# EAGLE board arduino-configuration-shield (EAGLE 6.5.0)
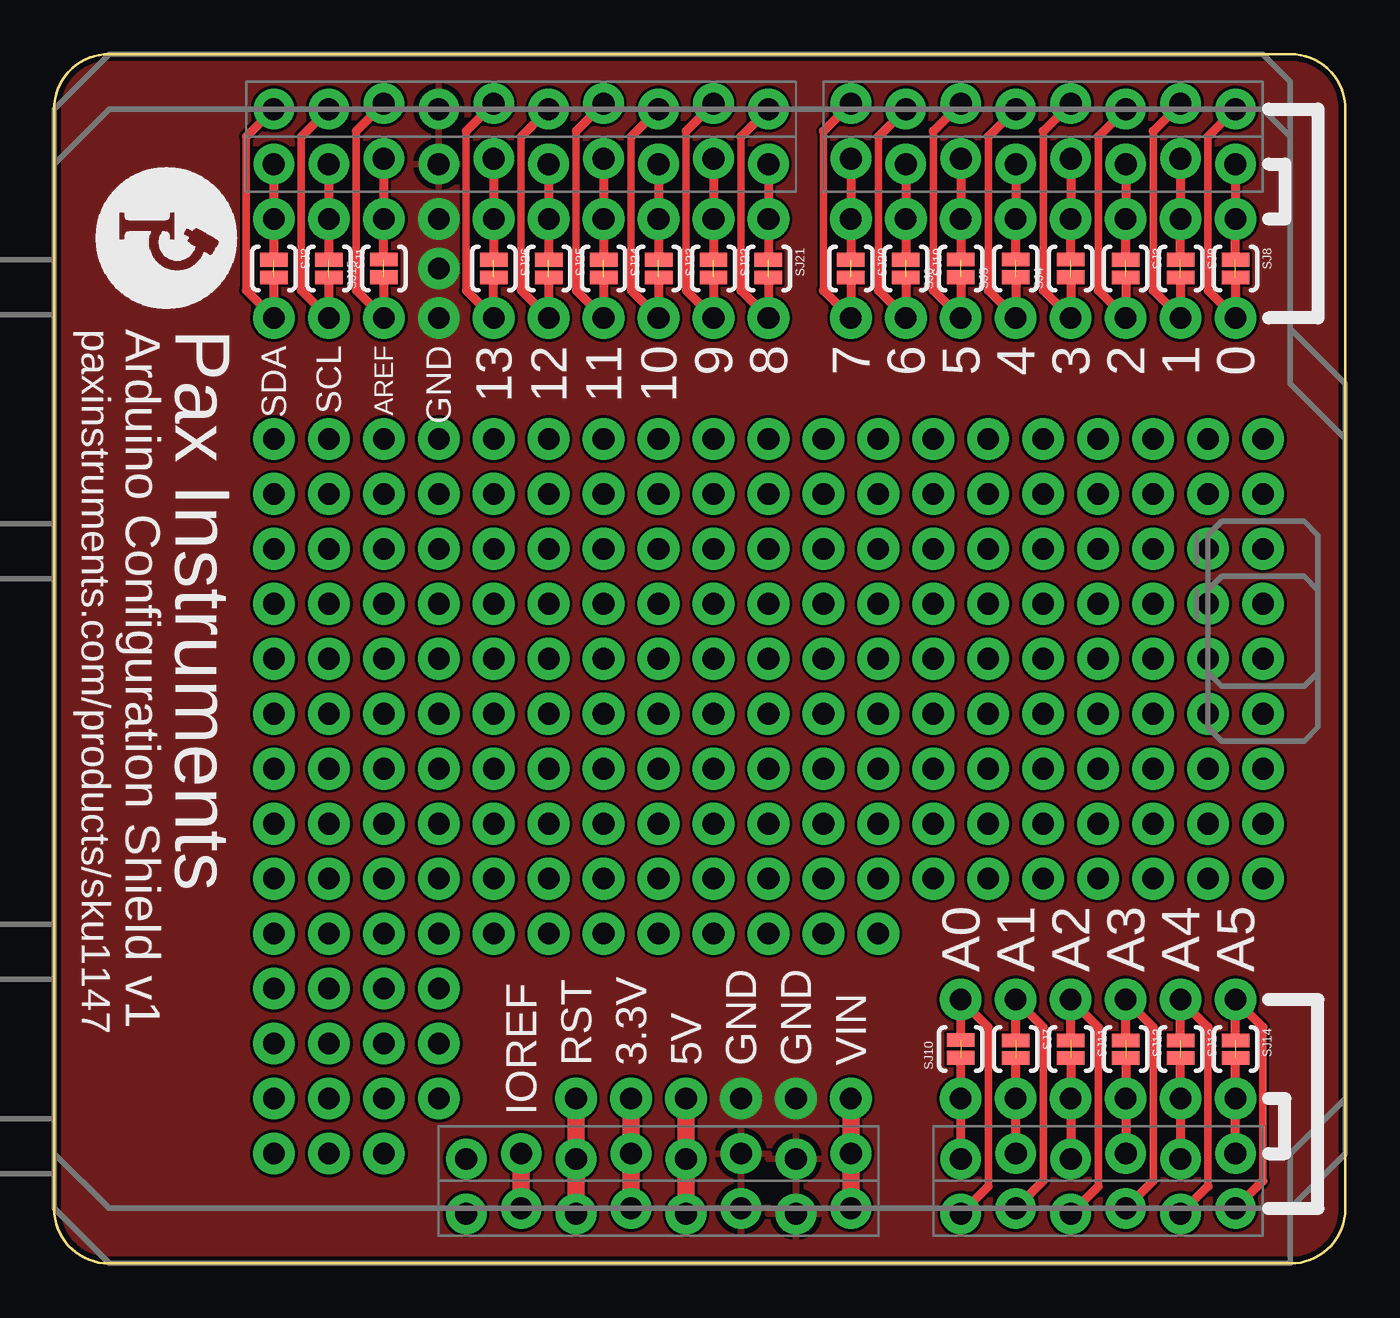
[diagram p0: board, top side]
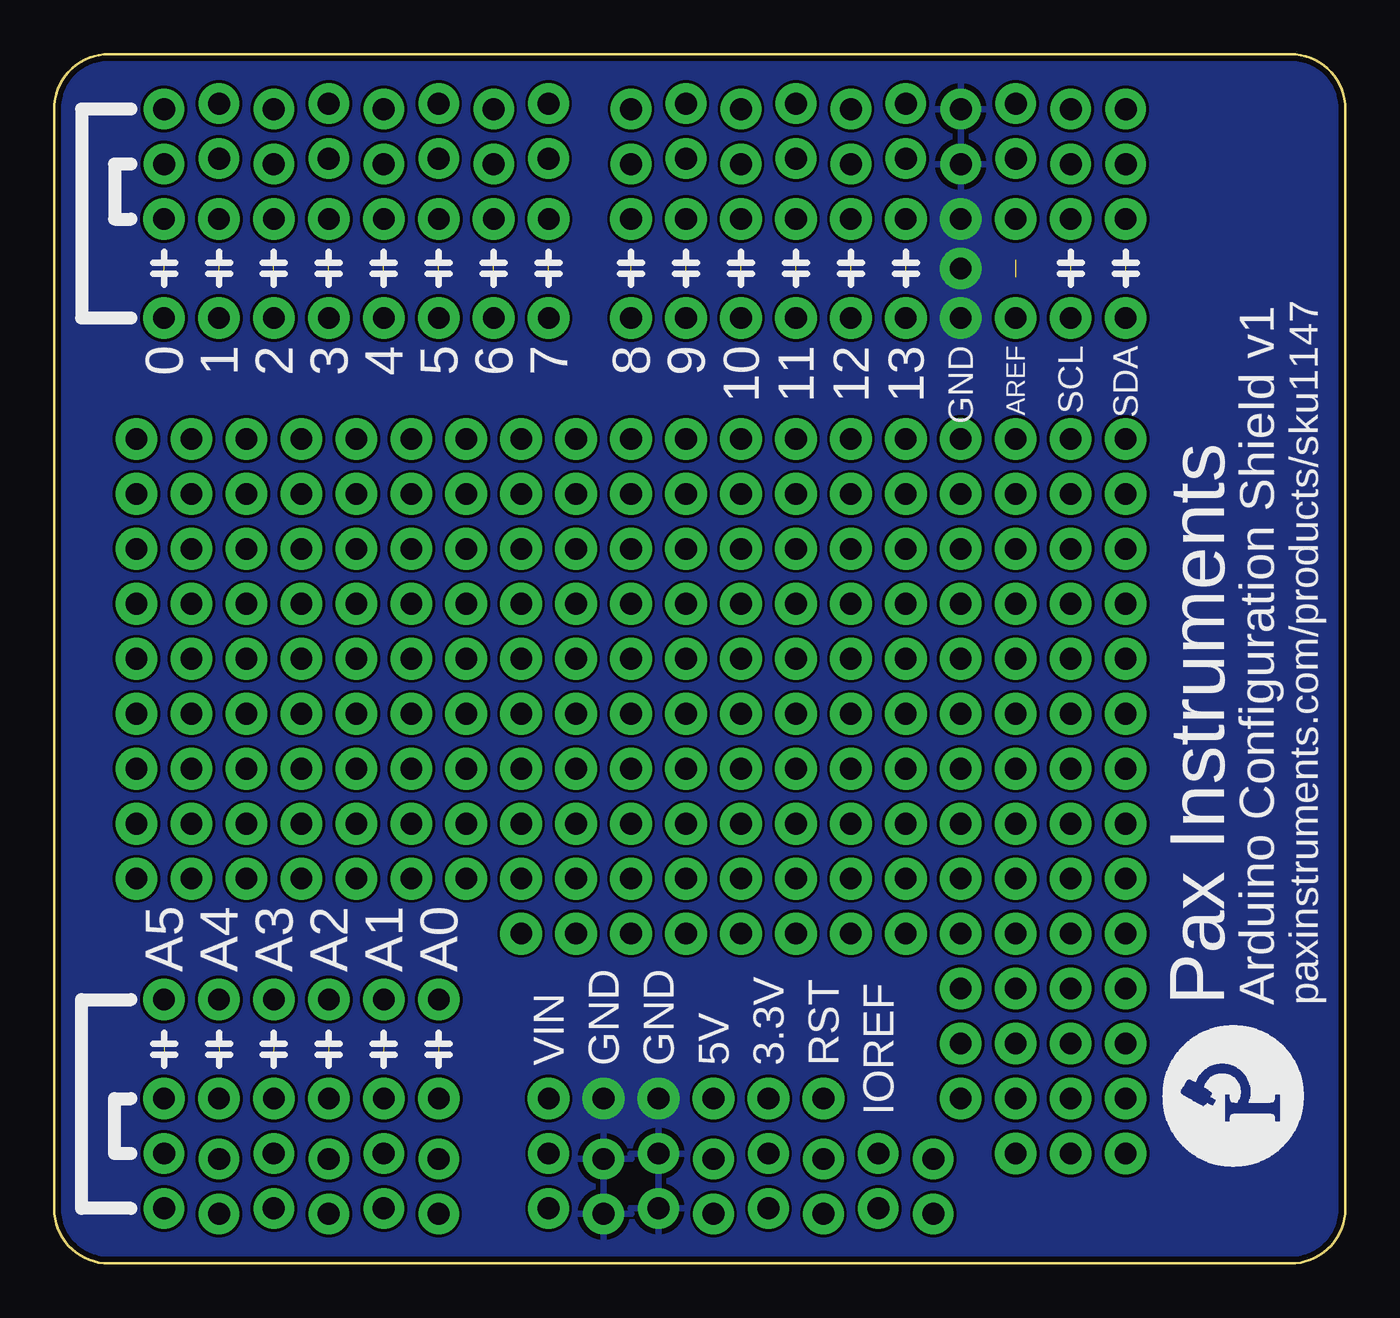
[diagram p1: board, bottom side, seen from below]

Size 59.69 x 55.88 mm. Coordinates in mm from the lower left corner, seen from the top.
Outline: 57.15,0 2.54,0 arc-90 0,2.54 0,53.34 arc-90 2.54,55.88 57.15,55.88 arc-90 59.69,53.34 59.69,2.54 arc-90 57.15,0
Copper layers (1*16): Top 0.035mm / dielectric 1.5mm / Bottom 0.035mm
Design rules "PaxInstrument-T400 *": minimum track width 6mil, minimum drill 13mil, track to track 5mil, track to pad 5mil, pad to pad 5mil, via to via 5mil, smd to smd 5mil, copper to edge 10mil, drill to drill 8mil, minimum pad ring 12mil, minimum via ring 10mil, stop-mask expansion 4mil, vias tented up to drill 25mil, thermal gap 10mil
Net classes: 0 default: width 0.203 mm, drill 0.33 mm; 1 power: width 0.305 mm

## Footprints (pad centres in the part's own frame; a part is rotated, then mirrored left to right if it is on the bottom)
UNO_R3_SHIELD_NOLABELS_LOCK = drill 1.016 pad 1.88: 3.3V 50.8,26.67; 5V 51.054,29.21; A0 51.054,41.91; A1 50.8,44.45; A2 51.054,46.99; A3 50.8,49.53; A4 51.054,52.07; A5 50.8,54.61; AREF 2.286,15.24; D2 2.54,49.53; D3 2.286,46.99; D4 2.54,44.45; D5 2.286,41.91; D6 2.54,39.37; D7 2.286,36.83; D8 2.54,33.02; D9 2.286,30.48; D10 2.54,27.94; D11 2.286,25.4; D12 2.54,22.86; D13 2.286,20.32; GND@0 50.8,31.75; GND@1 51.054,34.29; GND@2 2.54,17.78; IOREF 50.8,21.59; NC 51.054,19.05; RES 51.054,24.13; RX 2.54,54.61; SCL 2.54,10.16; SDA 2.54,12.7; TX 2.286,52.07; VIN 50.8,36.83
PAD-JUMPER-2-NC_BY_PASTE_YES_SILK = smd 0.635 x 1.27: 1 -0.401,0; 2 0.413,0

## Placement (x,y rotation side)
J1  ARDUINO_R3_SHIELDUNO_R3_SHIELD_NOLABELS_LOCK  [UNO_R3_SHIELD_NOLABELS_LOCK]  0,55.88 270 top
J3  ARDUINO_R3_SHIELDUNO_R3_SHIELD_NOLABELS_LOCK  [UNO_R3_SHIELD_NOLABELS_LOCK]  0,53.34 270 top
SJ1  JUMPER-PAD-2-NC_BY_PASTE  [PAD-JUMPER-2-NC_BY_PASTE_YES_SILK]  12.7,45.97 270 top
SJ2  JUMPER-PAD-2-NC_BY_PASTE  [PAD-JUMPER-2-NC_BY_PASTE_YES_SILK]  10.16,45.97 270 top
SJ3  JUMPER-PAD-2-NC_BY_PASTE  [PAD-JUMPER-2-NC_BY_PASTE_YES_SILK]  49.53,45.97 270 top
SJ4  JUMPER-PAD-2-NC_BY_PASTE  [PAD-JUMPER-2-NC_BY_PASTE_YES_SILK]  46.99,45.97 90 top
SJ5  JUMPER-PAD-2-NC_BY_PASTE  [PAD-JUMPER-2-NC_BY_PASTE_YES_SILK]  44.45,45.97 90 top
SJ6  JUMPER-PAD-2-NC_BY_PASTE  [PAD-JUMPER-2-NC_BY_PASTE_YES_SILK]  41.91,45.97 90 top
SJ7  JUMPER-PAD-2-NC_BY_PASTE  [PAD-JUMPER-2-NC_BY_PASTE_YES_SILK]  44.45,9.91 270 top
SJ8  JUMPER-PAD-2-NC_BY_PASTE  [PAD-JUMPER-2-NC_BY_PASTE_YES_SILK]  54.61,45.97 270 top
SJ9  JUMPER-PAD-2-NC_BY_PASTE  [PAD-JUMPER-2-NC_BY_PASTE_YES_SILK]  52.07,45.97 270 top
SJ10  JUMPER-PAD-2-NC_BY_PASTE  [PAD-JUMPER-2-NC_BY_PASTE_YES_SILK]  41.91,9.91 90 top
SJ11  JUMPER-PAD-2-NC_BY_PASTE  [PAD-JUMPER-2-NC_BY_PASTE_YES_SILK]  46.99,9.91 270 top
SJ12  JUMPER-PAD-2-NC_BY_PASTE  [PAD-JUMPER-2-NC_BY_PASTE_YES_SILK]  49.53,9.91 270 top
SJ13  JUMPER-PAD-2-NC_BY_PASTE  [PAD-JUMPER-2-NC_BY_PASTE_YES_SILK]  52.07,9.91 270 top
SJ14  JUMPER-PAD-2-NC_BY_PASTE  [PAD-JUMPER-2-NC_BY_PASTE_YES_SILK]  54.61,9.91 270 top
SJ15  JUMPER-PAD-2-NC_BY_PASTE  [PAD-JUMPER-2-NC_BY_PASTE_YES_SILK]  15.24,45.97 90 top
SJ19  JUMPER-PAD-2-NC_BY_PASTE  [PAD-JUMPER-2-NC_BY_PASTE_YES_SILK]  39.37,45.97 270 top
SJ20  JUMPER-PAD-2-NC_BY_PASTE  [PAD-JUMPER-2-NC_BY_PASTE_YES_SILK]  36.83,45.97 270 top
SJ21  JUMPER-PAD-2-NC_BY_PASTE  [PAD-JUMPER-2-NC_BY_PASTE_YES_SILK]  33.02,45.97 270 top
SJ22  JUMPER-PAD-2-NC_BY_PASTE  [PAD-JUMPER-2-NC_BY_PASTE_YES_SILK]  30.48,45.97 270 top
SJ23  JUMPER-PAD-2-NC_BY_PASTE  [PAD-JUMPER-2-NC_BY_PASTE_YES_SILK]  27.94,45.97 270 top
SJ24  JUMPER-PAD-2-NC_BY_PASTE  [PAD-JUMPER-2-NC_BY_PASTE_YES_SILK]  25.4,45.97 270 top
SJ25  JUMPER-PAD-2-NC_BY_PASTE  [PAD-JUMPER-2-NC_BY_PASTE_YES_SILK]  22.86,45.97 270 top
SJ26  JUMPER-PAD-2-NC_BY_PASTE  [PAD-JUMPER-2-NC_BY_PASTE_YES_SILK]  20.32,45.97 270 top
U$1  [PAXINSTRUMENT_LOGO]  1.78,4.32 90 bottom
U$6  [PAXINSTRUMENT_LOGO]  1.78,50.8 270 top

## Library data of the parts
J1 J3 = SparkFun-Boards
SJ1-SJ15 SJ19-SJ26 = SparkFun-Passives
U$1 U$6 = PaxInstrument-T400

## Nets
3.3V: J1.3.3V J3.3.3V
5V: J1.5V J3.5V
A0: J1.A0 J3.A0 SJ10.1 SJ10.2
A1: J1.A1 J3.A1 SJ7.1 SJ7.2
A2: J1.A2 J3.A2 SJ11.1 SJ11.2
A3: J1.A3 J3.A3 SJ12.1 SJ12.2
A4: J1.A4 J3.A4 SJ13.1 SJ13.2
A5: J1.A5 J3.A5 SJ14.1 SJ14.2
AREF: J1.AREF J3.AREF SJ15.1 SJ15.2
D0: J1.RX J3.RX SJ8.1 SJ8.2
D1: J1.TX J3.TX SJ9.1 SJ9.2
D2: J1.D2 J3.D2 SJ3.1 SJ3.2
D3: J1.D3 J3.D3 SJ4.1 SJ4.2
D4: J1.D4 J3.D4 SJ5.1 SJ5.2
D5: J1.D5 J3.D5 SJ6.1 SJ6.2
D6: J1.D6 J3.D6 SJ19.1 SJ19.2
D7: J1.D7 J3.D7 SJ20.1 SJ20.2
D8: J1.D8 J3.D8 SJ21.1 SJ21.2
D9: J1.D9 J3.D9 SJ22.1 SJ22.2
D10: J1.D10 J3.D10 SJ23.1 SJ23.2
D11(MOSI): J1.D11 J3.D11 SJ24.1 SJ24.2
D12(MISO): J1.D12 J3.D12 SJ25.1 SJ25.2
D13(SCK): J1.D13 J3.D13 SJ26.1 SJ26.2
GND: J1.GND@0 J1.GND@1 J1.GND@2 J3.GND@0 J3.GND@1 J3.GND@2
IOREF: J1.IOREF J3.IOREF
RESET: J1.RES J3.RES
SCL: J1.SCL J3.SCL SJ2.1 SJ2.2
SDA: J1.SDA J3.SDA SJ1.1 SJ1.2
VIN: J1.VIN J3.VIN

## Tracks (layer width: path | path; a pad name or v marks a point on that pad's centre or on a via)
3.3V  (via drill 1 pad 1.93)
  Top 0.813: J3.3.3V J1.3.3V v26.67,7.62
5V  (via drill 1 pad 1.93)
  Top 0.813: J3.5V J1.5V v29.21,7.62
A0  (via drill 1 pad 1.93)  (1 unrouted)
  Top 0.356: 43.18,3.56 43.18,10.92
  Top 0.406: J3.A0 43.18,3.56 | 43.18,10.92 v41.91,12.19 SJ10.2 | SJ10.1 v41.91,7.62 J1.A0
A1  (via drill 1 pad 1.93)  (1 unrouted)
  Top 0.356: 45.72,3.81 45.72,10.92
  Top 0.406: J3.A1 45.72,3.81 | 45.72,10.92 v44.45,12.19 SJ7.1 | SJ7.2 v44.45,7.62 J1.A1
A2  (via drill 1 pad 1.93)  (1 unrouted)
  Top 0.356: 48.26,3.56 48.26,10.92
  Top 0.406: J3.A2 48.26,3.56 | 48.26,10.92 v46.99,12.19 SJ11.1 | v46.99,7.62 SJ11.2 J1.A2
A3  (via drill 1 pad 1.93)  (1 unrouted)
  Top 0.356: 50.8,3.81 50.8,10.92
  Top 0.406: J3.A3 50.8,3.81 | 50.8,10.92 v49.53,12.19 SJ12.1 | v49.53,7.62 SJ12.2 J1.A3
A4  (via drill 1 pad 1.93)  (1 unrouted)
  Top 0.356: 53.34,3.56 53.34,10.92
  Top 0.406: SJ13.2 v52.07,7.62 J1.A4 | SJ13.1 v52.07,12.19 53.34,10.92 | J3.A4 53.34,3.56
A5  (via drill 1 pad 1.93)  (1 unrouted)
  Top 0.356: 55.88,3.81 55.88,10.92
  Top 0.406: J1.A5 v54.61,7.62 SJ14.2 | SJ14.1 v54.61,12.19 55.88,10.92 | J3.A5 55.88,3.81
AREF  (via drill 1 pad 1.93)  (1 unrouted)
  Top 0.356: 13.97,52.32 13.97,44.96
  Top 0.406: J3.AREF v15.24,48.26 SJ15.2 | J1.AREF 13.97,52.32 | 13.97,44.96 v15.24,43.69 SJ15.1
D0  (via drill 1 pad 1.93)  (1 unrouted)
  Top 0.356: 53.34,52.07 53.34,44.96
  Top 0.406: J1.RX 53.34,52.07 | 53.34,44.96 v54.61,43.69 SJ8.2 | J3.RX v54.61,48.26 SJ8.1
D1  (via drill 1 pad 1.93)  (1 unrouted)
  Top 0.356: 50.8,52.32 50.8,44.96
  Top 0.406: J1.TX 50.8,52.32 | 50.8,44.96 v52.07,43.69 SJ9.2 | J3.TX v52.07,48.26 SJ9.1
D2  (via drill 1 pad 1.93)  (1 unrouted)
  Top 0.356: 48.26,52.07 48.26,44.96
  Top 0.406: J1.D2 48.26,52.07 | 48.26,44.96 v49.53,43.69 SJ3.2 | J3.D2 v49.53,48.26 SJ3.1
D3  (via drill 1 pad 1.93)  (1 unrouted)
  Top 0.356: 45.72,52.32 45.72,44.96
  Top 0.406: J1.D3 45.72,52.32 | 45.72,44.96 v46.99,43.69 SJ4.1 | J3.D3 v46.99,48.26 SJ4.2
D4  (via drill 1 pad 1.93)  (1 unrouted)
  Top 0.356: 43.18,52.07 43.18,44.96
  Top 0.406: J1.D4 43.18,52.07 | 43.18,44.96 v44.45,43.69 SJ5.1 | J3.D4 v44.45,48.26 SJ5.2
D5  (via drill 1 pad 1.93)  (1 unrouted)
  Top 0.356: 40.64,52.32 40.64,44.96
  Top 0.406: J1.D5 40.64,52.32 | 40.64,44.96 v41.91,43.69 SJ6.1 | SJ6.2 v41.91,48.26 J3.D5
D6  (via drill 1 pad 1.93)  (1 unrouted)
  Top 0.356: 38.1,52.07 38.1,44.96
  Top 0.406: J1.D6 38.1,52.07 | 38.1,44.96 v39.37,43.69 SJ19.2 | SJ19.1 v39.37,48.26 J3.D6
D7  (via drill 1 pad 1.93)  (1 unrouted)
  Top 0.356: 35.56,52.32 35.56,44.96
  Top 0.406: J1.D7 35.56,52.32 | 35.56,44.96 v36.83,43.69 SJ20.2 | SJ20.1 v36.83,48.26 J3.D7
D8  (via drill 1 pad 1.93)  (1 unrouted)
  Top 0.356: 31.75,52.07 31.75,44.96
  Top 0.406: J3.D8 v33.02,48.26 SJ21.1 | SJ21.2 v33.02,43.69 31.75,44.96 | J1.D8 31.75,52.07
D9  (via drill 1 pad 1.93)  (1 unrouted)
  Top 0.356: 29.21,52.32 29.21,44.96
  Top 0.406: J3.D9 v30.48,48.26 SJ22.1 | SJ22.2 v30.48,43.69 29.21,44.96 | J1.D9 29.21,52.32
D10  (via drill 1 pad 1.93)  (1 unrouted)
  Top 0.356: 26.67,52.07 26.67,44.96
  Top 0.406: J3.D10 v27.94,48.26 SJ23.1 | SJ23.2 v27.94,43.69 26.67,44.96 | J1.D10 26.67,52.07
D11(MOSI)  (via drill 1 pad 1.93)  (1 unrouted)
  Top 0.356: 24.13,52.32 24.13,44.96
  Top 0.406: J3.D11 v25.4,48.26 SJ24.1 | SJ24.2 v25.4,43.69 24.13,44.96 | J1.D11 24.13,52.32
D12(MISO)  (via drill 1 pad 1.93)  (1 unrouted)
  Top 0.356: 21.59,52.07 21.59,44.96
  Top 0.406: J3.D12 v22.86,48.26 SJ25.1 | SJ25.2 v22.86,43.69 21.59,44.96 | J1.D12 21.59,52.07
D13(SCK)  (via drill 1 pad 1.93)  (1 unrouted)
  Top 0.356: 19.05,52.32 19.05,44.96
  Top 0.406: J3.D13 v20.32,48.26 SJ26.1 | SJ26.2 v20.32,43.69 19.05,44.96 | J1.D13 19.05,52.32
GND  (via drill 1 pad 1.93)
  other vias: 17.78,43.69 17.78,48.26 31.75,7.62 34.29,7.62 17.78,45.97
  pour Bottom: 59.69,55.88 59.69,0 0,0 0,55.88
  pour Top: 59.69,55.88 59.69,0 0,0 0,55.88
IOREF
  Top 0.813: J1.IOREF J3.IOREF
N$1  (via drill 1 pad 1.93)
  other vias: 10.16,33.02
N$2  (via drill 1 pad 1.93)
  other vias: 10.16,30.48
N$4  (via drill 1 pad 1.93)
  other vias: 12.7,30.48
N$5  (via drill 1 pad 1.93)
  other vias: 12.7,33.02
N$7  (via drill 1 pad 1.93)
  other vias: 15.24,33.02
N$10  (via drill 1 pad 1.93)
  other vias: 15.24,30.48
N$11  (via drill 1 pad 1.93)
  other vias: 15.24,27.94
N$12  (via drill 1 pad 1.93)
  other vias: 12.7,27.94
N$13  (via drill 1 pad 1.93)
  other vias: 10.16,27.94
N$14  (via drill 1 pad 1.93)
  other vias: 10.16,25.4
N$15  (via drill 1 pad 1.93)
  other vias: 12.7,25.4
N$16  (via drill 1 pad 1.93)
  other vias: 15.24,25.4
N$17  (via drill 1 pad 1.93)
  other vias: 17.78,25.4
N$20  (via drill 1 pad 1.93)
  other vias: 17.78,27.94
N$25  (via drill 1 pad 1.93)
  other vias: 17.78,30.48
N$26  (via drill 1 pad 1.93)
  other vias: 17.78,33.02
N$27  (via drill 1 pad 1.93)
  other vias: 20.32,33.02
N$28  (via drill 1 pad 1.93)
  other vias: 20.32,30.48
N$29  (via drill 1 pad 1.93)
  other vias: 20.32,27.94
N$31  (via drill 1 pad 1.93)
  other vias: 20.32,25.4
N$33  (via drill 1 pad 1.93)
  other vias: 20.32,22.86
N$34  (via drill 1 pad 1.93)
  other vias: 17.78,22.86
N$35  (via drill 1 pad 1.93)
  other vias: 15.24,22.86
N$36  (via drill 1 pad 1.93)
  other vias: 12.7,22.86
N$37  (via drill 1 pad 1.93)
  other vias: 10.16,22.86
N$38  (via drill 1 pad 1.93)
  other vias: 10.16,20.32
N$39  (via drill 1 pad 1.93)
  other vias: 12.7,20.32
N$40  (via drill 1 pad 1.93)
  other vias: 15.24,20.32
N$41  (via drill 1 pad 1.93)
  other vias: 17.78,20.32
N$42  (via drill 1 pad 1.93)
  other vias: 20.32,20.32
N$43  (via drill 1 pad 1.93)
  other vias: 22.86,20.32
N$45  (via drill 1 pad 1.93)
  other vias: 22.86,22.86
N$47  (via drill 1 pad 1.93)
  other vias: 22.86,25.4
N$51  (via drill 1 pad 1.93)
  other vias: 22.86,27.94
N$52  (via drill 1 pad 1.93)
  other vias: 22.86,30.48
N$53  (via drill 1 pad 1.93)
  other vias: 22.86,33.02
N$54  (via drill 1 pad 1.93)
  other vias: 25.4,33.02
N$55  (via drill 1 pad 1.93)
  other vias: 27.94,33.02
N$56  (via drill 1 pad 1.93)
  other vias: 27.94,30.48
N$57  (via drill 1 pad 1.93)
  other vias: 25.4,30.48
N$58  (via drill 1 pad 1.93)
  other vias: 25.4,27.94
N$59  (via drill 1 pad 1.93)
  other vias: 27.94,27.94
N$60  (via drill 1 pad 1.93)
  other vias: 27.94,25.4
N$61  (via drill 1 pad 1.93)
  other vias: 25.4,25.4
N$62  (via drill 1 pad 1.93)
  other vias: 25.4,22.86
N$63  (via drill 1 pad 1.93)
  other vias: 27.94,22.86
N$64  (via drill 1 pad 1.93)
  other vias: 27.94,20.32
N$65  (via drill 1 pad 1.93)
  other vias: 25.4,20.32
N$66  (via drill 1 pad 1.93)
  other vias: 25.4,17.78
N$67  (via drill 1 pad 1.93)
  other vias: 27.94,17.78
N$68  (via drill 1 pad 1.93)
  other vias: 27.94,15.24
N$69  (via drill 1 pad 1.93)
  other vias: 10.16,17.78
N$70  (via drill 1 pad 1.93)
  other vias: 10.16,15.24
N$71  (via drill 1 pad 1.93)
  other vias: 12.7,15.24
N$72  (via drill 1 pad 1.93)
  other vias: 12.7,17.78
N$73  (via drill 1 pad 1.93)
  other vias: 15.24,17.78
N$75  (via drill 1 pad 1.93)
  other vias: 15.24,15.24
N$76  (via drill 1 pad 1.93)
  other vias: 17.78,15.24
N$77  (via drill 1 pad 1.93)
  other vias: 17.78,17.78
N$78  (via drill 1 pad 1.93)
  other vias: 20.32,17.78
N$79  (via drill 1 pad 1.93)
  other vias: 20.32,15.24
N$80  (via drill 1 pad 1.93)
  other vias: 22.86,15.24
N$81  (via drill 1 pad 1.93)
  other vias: 22.86,17.78
N$82  (via drill 1 pad 1.93)
  other vias: 25.4,15.24
N$83  (via drill 1 pad 1.93)
  other vias: 10.16,35.56
N$84  (via drill 1 pad 1.93)
  other vias: 12.7,35.56
N$85  (via drill 1 pad 1.93)
  other vias: 15.24,35.56
N$86  (via drill 1 pad 1.93)
  other vias: 17.78,35.56
N$87  (via drill 1 pad 1.93)
  other vias: 20.32,35.56
N$88  (via drill 1 pad 1.93)
  other vias: 22.86,35.56
N$89  (via drill 1 pad 1.93)
  other vias: 25.4,35.56
N$90  (via drill 1 pad 1.93)
  other vias: 27.94,35.56
N$91  (via drill 1 pad 1.93)
  other vias: 30.48,35.56
N$92  (via drill 1 pad 1.93)
  other vias: 33.02,35.56
N$93  (via drill 1 pad 1.93)
  other vias: 35.56,35.56
N$94  (via drill 1 pad 1.93)
  other vias: 38.1,35.56
N$96  (via drill 1 pad 1.93)
  other vias: 40.64,35.56
N$97  (via drill 1 pad 1.93)
  other vias: 43.18,35.56
N$98  (via drill 1 pad 1.93)
  other vias: 45.72,35.56
N$99  (via drill 1 pad 1.93)
  other vias: 30.48,33.02
N$100  (via drill 1 pad 1.93)
  other vias: 33.02,33.02
N$101  (via drill 1 pad 1.93)
  other vias: 35.56,33.02
N$102  (via drill 1 pad 1.93)
  other vias: 38.1,33.02
N$103  (via drill 1 pad 1.93)
  other vias: 40.64,33.02
N$104  (via drill 1 pad 1.93)
  other vias: 43.18,33.02
N$105  (via drill 1 pad 1.93)
  other vias: 45.72,33.02
N$106  (via drill 1 pad 1.93)
  other vias: 45.72,30.48
N$107  (via drill 1 pad 1.93)
  other vias: 43.18,30.48
N$108  (via drill 1 pad 1.93)
  other vias: 40.64,30.48
N$109  (via drill 1 pad 1.93)
  other vias: 38.1,30.48
N$110  (via drill 1 pad 1.93)
  other vias: 35.56,30.48
N$111  (via drill 1 pad 1.93)
  other vias: 33.02,30.48
N$112  (via drill 1 pad 1.93)
  other vias: 30.48,30.48
N$113  (via drill 1 pad 1.93)
  other vias: 30.48,27.94
N$114  (via drill 1 pad 1.93)
  other vias: 33.02,27.94
N$115  (via drill 1 pad 1.93)
  other vias: 35.56,27.94
N$116  (via drill 1 pad 1.93)
  other vias: 38.1,27.94
N$117  (via drill 1 pad 1.93)
  other vias: 40.64,27.94
N$118  (via drill 1 pad 1.93)
  other vias: 43.18,27.94
N$119  (via drill 1 pad 1.93)
  other vias: 45.72,27.94
N$120  (via drill 1 pad 1.93)
  other vias: 45.72,25.4
N$121  (via drill 1 pad 1.93)
  other vias: 45.72,22.86
N$122  (via drill 1 pad 1.93)
  other vias: 45.72,20.32
N$123  (via drill 1 pad 1.93)
  other vias: 45.72,17.78
N$124  (via drill 1 pad 1.93)
  other vias: 43.18,17.78
N$125  (via drill 1 pad 1.93)
  other vias: 40.64,17.78
N$126  (via drill 1 pad 1.93)
  other vias: 38.1,17.78
N$127  (via drill 1 pad 1.93)
  other vias: 38.1,15.24
N$128  (via drill 1 pad 1.93)
  other vias: 35.56,15.24
N$129  (via drill 1 pad 1.93)
  other vias: 33.02,15.24
N$130  (via drill 1 pad 1.93)
  other vias: 30.48,15.24
N$131  (via drill 1 pad 1.93)
  other vias: 30.48,17.78
N$132  (via drill 1 pad 1.93)
  other vias: 33.02,17.78
N$133  (via drill 1 pad 1.93)
  other vias: 35.56,17.78
N$134  (via drill 1 pad 1.93)
  other vias: 30.48,20.32
N$135  (via drill 1 pad 1.93)
  other vias: 30.48,22.86
N$136  (via drill 1 pad 1.93)
  other vias: 30.48,25.4
N$137  (via drill 1 pad 1.93)
  other vias: 33.02,25.4
N$138  (via drill 1 pad 1.93)
  other vias: 33.02,22.86
N$139  (via drill 1 pad 1.93)
  other vias: 33.02,20.32
N$140  (via drill 1 pad 1.93)
  other vias: 35.56,20.32
N$141  (via drill 1 pad 1.93)
  other vias: 35.56,22.86
N$142  (via drill 1 pad 1.93)
  other vias: 35.56,25.4
N$143  (via drill 1 pad 1.93)
  other vias: 38.1,25.4
N$144  (via drill 1 pad 1.93)
  other vias: 38.1,22.86
N$145  (via drill 1 pad 1.93)
  other vias: 38.1,20.32
N$146  (via drill 1 pad 1.93)
  other vias: 40.64,20.32
N$147  (via drill 1 pad 1.93)
  other vias: 40.64,22.86
N$148  (via drill 1 pad 1.93)
  other vias: 40.64,25.4
N$149  (via drill 1 pad 1.93)
  other vias: 43.18,25.4
N$150  (via drill 1 pad 1.93)
  other vias: 43.18,22.86
N$151  (via drill 1 pad 1.93)
  other vias: 43.18,20.32
N$152  (via drill 1 pad 1.93)
  other vias: 10.16,12.7
N$153  (via drill 1 pad 1.93)
  other vias: 12.7,12.7
N$154  (via drill 1 pad 1.93)
  other vias: 15.24,12.7
N$155  (via drill 1 pad 1.93)
  other vias: 17.78,12.7
N$156  (via drill 1 pad 1.93)
  other vias: 17.78,10.16
N$157  (via drill 1 pad 1.93)
  other vias: 15.24,10.16
N$158  (via drill 1 pad 1.93)
  other vias: 12.7,10.16
N$159  (via drill 1 pad 1.93)
  other vias: 10.16,10.16
N$160  (via drill 1 pad 1.93)
  other vias: 10.16,7.62
N$161  (via drill 1 pad 1.93)
  other vias: 12.7,7.62
N$162  (via drill 1 pad 1.93)
  other vias: 15.24,7.62
N$163  (via drill 1 pad 1.93)
  other vias: 10.16,5.08
N$164  (via drill 1 pad 1.93)
  other vias: 12.7,5.08
N$165  (via drill 1 pad 1.93)
  other vias: 15.24,5.08
N$166  (via drill 1 pad 1.93)
  other vias: 48.26,35.56
N$167  (via drill 1 pad 1.93)
  other vias: 48.26,33.02
N$168  (via drill 1 pad 1.93)
  other vias: 48.26,30.48
N$169  (via drill 1 pad 1.93)
  other vias: 48.26,27.94
N$170  (via drill 1 pad 1.93)
  other vias: 48.26,25.4
N$171  (via drill 1 pad 1.93)
  other vias: 48.26,22.86
N$172  (via drill 1 pad 1.93)
  other vias: 48.26,20.32
N$173  (via drill 1 pad 1.93)
  other vias: 48.26,17.78
N$174  (via drill 1 pad 1.93)
  other vias: 50.8,17.78
N$175  (via drill 1 pad 1.93)
  other vias: 53.34,17.78
N$176  (via drill 1 pad 1.93)
  other vias: 55.88,17.78
N$177  (via drill 1 pad 1.93)
  other vias: 55.88,20.32
N$178  (via drill 1 pad 1.93)
  other vias: 53.34,20.32
N$179  (via drill 1 pad 1.93)
  other vias: 50.8,20.32
N$180  (via drill 1 pad 1.93)
  other vias: 50.8,22.86
N$181  (via drill 1 pad 1.93)
  other vias: 53.34,22.86
N$182  (via drill 1 pad 1.93)
  other vias: 55.88,22.86
N$183  (via drill 1 pad 1.93)
  other vias: 55.88,25.4
N$184  (via drill 1 pad 1.93)
  other vias: 53.34,25.4
N$185  (via drill 1 pad 1.93)
  other vias: 50.8,25.4
N$186  (via drill 1 pad 1.93)
  other vias: 50.8,27.94
N$187  (via drill 1 pad 1.93)
  other vias: 50.8,30.48
N$188  (via drill 1 pad 1.93)
  other vias: 50.8,33.02
N$189  (via drill 1 pad 1.93)
  other vias: 50.8,35.56
N$190  (via drill 1 pad 1.93)
  other vias: 53.34,35.56
N$191  (via drill 1 pad 1.93)
  other vias: 55.88,35.56
N$192  (via drill 1 pad 1.93)
  other vias: 55.88,33.02
N$193  (via drill 1 pad 1.93)
  other vias: 55.88,30.48
N$194  (via drill 1 pad 1.93)
  other vias: 55.88,27.94
N$195  (via drill 1 pad 1.93)
  other vias: 53.34,27.94
N$196  (via drill 1 pad 1.93)
  other vias: 53.34,30.48
N$197  (via drill 1 pad 1.93)
  other vias: 53.34,33.02
N$198  (via drill 1 pad 1.93)
  other vias: 55.88,38.1
N$199  (via drill 1 pad 1.93)
  other vias: 53.34,38.1
N$200  (via drill 1 pad 1.93)
  other vias: 50.8,38.1
N$201  (via drill 1 pad 1.93)
  other vias: 48.26,38.1
N$202  (via drill 1 pad 1.93)
  other vias: 45.72,38.1
N$203  (via drill 1 pad 1.93)
  other vias: 43.18,38.1
N$204  (via drill 1 pad 1.93)
  other vias: 40.64,38.1
N$205  (via drill 1 pad 1.93)
  other vias: 38.1,38.1
N$206  (via drill 1 pad 1.93)
  other vias: 35.56,38.1
N$207  (via drill 1 pad 1.93)
  other vias: 33.02,38.1
N$208  (via drill 1 pad 1.93)
  other vias: 30.48,38.1
N$209  (via drill 1 pad 1.93)
  other vias: 27.94,38.1
N$210  (via drill 1 pad 1.93)
  other vias: 25.4,38.1
N$211  (via drill 1 pad 1.93)
  other vias: 22.86,38.1
N$212  (via drill 1 pad 1.93)
  other vias: 20.32,38.1
N$213  (via drill 1 pad 1.93)
  other vias: 17.78,38.1
N$214  (via drill 1 pad 1.93)
  other vias: 15.24,38.1
N$215  (via drill 1 pad 1.93)
  other vias: 12.7,38.1
N$216  (via drill 1 pad 1.93)
  other vias: 10.16,38.1
N$217  (via drill 1 pad 1.93)
  other vias: 17.78,7.62
RESET  (via drill 1 pad 1.93)
  Top 0.813: J3.RES J1.RES v24.13,7.62
SCL  (via drill 1 pad 1.93)  (1 unrouted)
  Top 0.356: 8.89,52.07 8.89,44.96
  Top 0.406: J3.SCL v10.16,48.26 SJ2.1 | J1.SCL 8.89,52.07 | 8.89,44.96 v10.16,43.69 SJ2.2
SDA  (via drill 1 pad 1.93)  (1 unrouted)
  Top 0.356: 11.43,52.07 11.43,44.96
  Top 0.406: J1.SDA 11.43,52.07 | 11.43,44.96 v12.7,43.69 SJ1.2 | SJ1.1 v12.7,48.26 J3.SDA
VIN  (via drill 1 pad 1.93)
  Top 0.813: J3.VIN J1.VIN v36.83,7.62

## Text on the board
tPlace: paxinstruments.com/products/sku1147 | Arduino Configuration Shield v1 | Pax Instruments | SDA | SCL | AREF | GND | 13 | 12 | 11 | 10 | 9 | 8 | 7 | 6 | 5 | 4 | 3 | 2 | 1 | 0 | A0 | A1 | A2 | A3 | A4 | A5 | RST | 3.3V | 5V | GND | GND | VIN | IOREF
bPlace: SDA | SCL | AREF | GND | 13 | 12 | 11 | 10 | 9 | 8 | 7 | 6 | 5 | 4 | 3 | 2 | 1 | 0 | A0 | A1 | A2 | A3 | A4 | A5 | paxinstruments.com/products/sku1147 | Arduino Configuration Shield v1 | Pax Instruments | RST | 3.3V | 5V | GND | GND | VIN | IOREF